# Altium PCB SLT.PcbDoc (part 7 of 8)
Units mm, origin at the board's own origin, x right, y up, seen from the top; angles counter-clockwise.
Board outline 150 x 66 mm, 6 copper layers (L1 TOP, L2 GND 1, L3 SIGNAL, L4 PWR, L5 GND 2, L6 BOT), stack 1.598 mm thick; 797 components, 541 nets, 2680 pads, 2120 vias.
Unrouted connection lines stored in the file: 31.
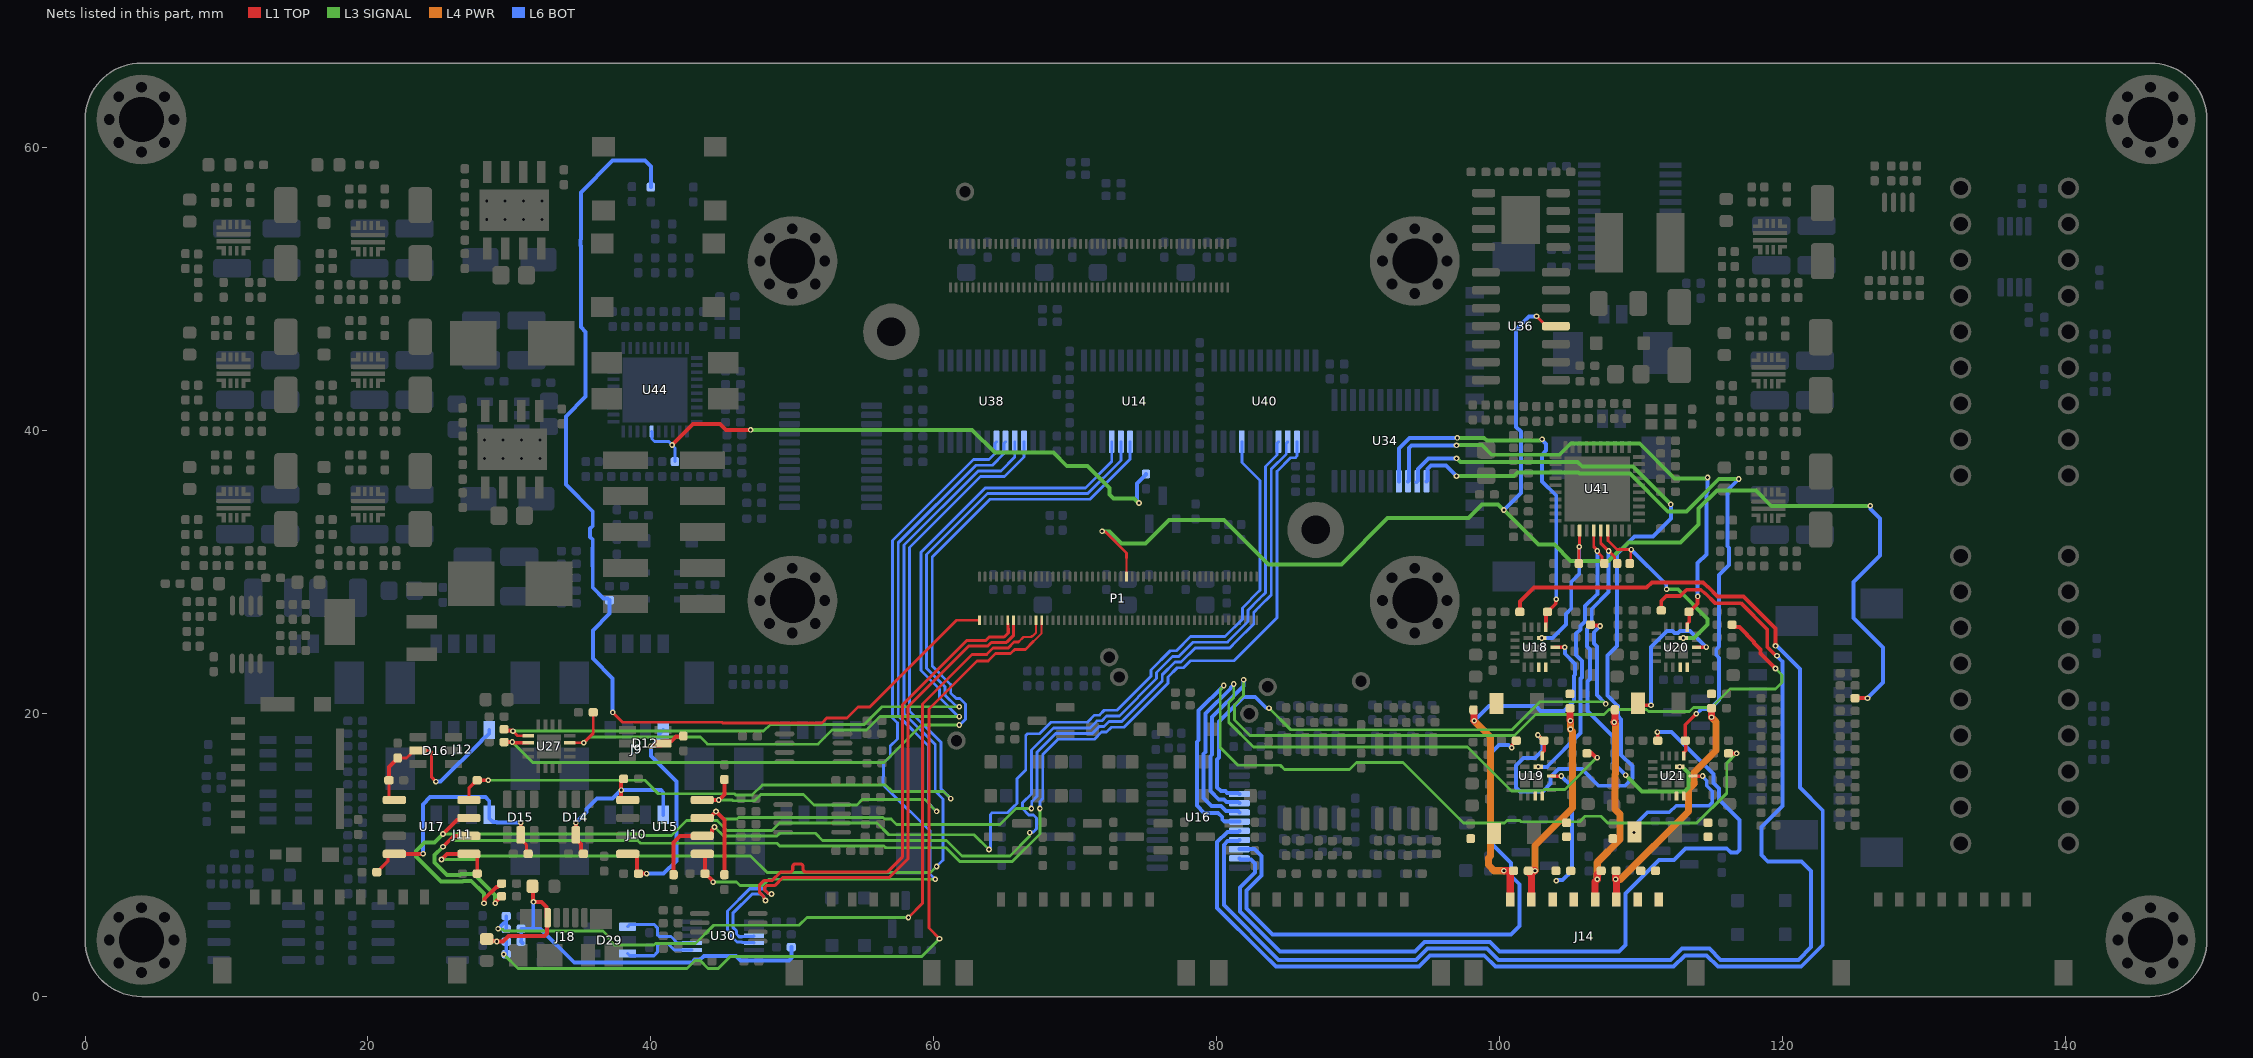
[diagram p11: the nets of this part, all layers, seen from the top]

## Via types
v1: diameter 0.4, hole 0.2, L1 TOP to L6 BOT, tented both sides, 2120 vias

## Nets (pads, with @x,y where several pads share a name; then routed paths per layer and width w, separated by ;. In a path a pad name is that pad's centre, name@x,y a point inside that pad or via, vN(x,y) a via of type N, cw(c..) or ccw(c..) an arc to the next point about the centre after c; other vN are vias at no path point) (continued)
SPI1_SCK: P1.53 R66.1 U36.4 | length 101
  L1 TOP w0.15: P1.53@73.625,29.69 73.625,31
  L1 TOP w0.2: v1(71.9,32.9) 71.938,32.862 72.134,32.862 73.625,31.371 73.625,31 ; v1(102.6,48.1) 102.6,48.095 103.295,47.4 U36.4@103.975,47.4
  L1 TOP w0.28: R66.1@125.125,21.1 v1(126,21.1)
  L3 SIGNAL w0.28: v1(71.9,32.9) 71.923,32.877 72.43,32.877 73.277,32.03 74.979,32.03 76.639,33.69 80.517,33.69 83.647,30.56 88.817,30.56 92.087,33.83 97.802,33.83 98.762,34.79 99.878,34.79 100.268,34.4 v1@100.276,34.4 ; v1(100.3,34.4) 102.75,31.95 103.882,31.95 105.022,30.81 107.703,30.81 108.514,31.621 108.628,31.621 109.1,32.093 112.786,32.093 114.071,33.378 114.071,34.505 115.356,35.79 116.477,35.79 118.11,35.79 119.2,34.7 121.476,34.7 v1@126.18,34.7
  L6 BOT w0.28: v1(100.3,34.4) 101.5,35.6 101.5,39.95 101.17,40.28 101.17,47.163 102.084,48.077 102.577,48.077 v1(102.6,48.1) ; v1(126,21.1) 127.1,22.2 127.1,24.669 125,26.769 125,29.3 126.9,31.2 126.9,33.8 126.223,34.477 126.223,34.677 v1(126.2,34.7)
SYS_nRST_PMIC: P1.2 R76.2 R251.2 | length 76.9
  L1 TOP w0.15: 62.5,26.61 P1.2@63.225,26.61
  L1 TOP w0.2: v1(37.3,20.1) 38.005,19.395 45.023,19.395 45.068,19.35 52.086,19.35 52.436,19.7 53.864,19.7 54.634,20.47 55.47,20.47 61.61,26.61 62.5,26.61
  L6 BOT w0.28: v1(37.3,20.1) 37.3,22.506 35.9,23.906 35.9,25.9 37.075,27.075 R251.2@37.075,28.025 36.939,28.161 36.639,28.161 35.89,28.91 35.89,30.44 35.88,30.45 35.88,31.707 35.89,31.717 35.89,32.32 35.71,32.5 35.71,33.103 35.89,33.283 35.89,34.31 33.99,36.21 33.99,41.011 35.39,42.411 35.39,46.993 35.05,47.333 35.05,53.057 35.01,53.097 35.01,53.503 35.05,53.543 35.05,56.85 37.3,59.1 39.6,59.1 40,58.7 R76.2@40,57.225
TEC_ADC_1: C73.2 U18.20 U41.33 | length 10.3
  L1 TOP w0.2: C73.2@105.6,30.625 105.613,30.637 105.613,31.788 105.638,31.812 105.638,32.942 U41.33@105.65,32.955
  L6 BOT w0.28: v1(102.975,25.35) 103.743,25.35 104.69,26.297 104.69,27.065 105.06,27.435 105.06,29.329 105.625,29.894 v1(105.625,31.8)
TEC_ADC_2: C230.2 U20.20 U41.37 | length 13.8
  L1 TOP w0.2: U41.37@107.65,32.955 107.65,32.235 108.285,31.6 v1(109.3,31.6) 109.262,31.562 109.262,30.687 C230.2@109.2,30.625
  L3 SIGNAL w0.28: v1(111.8,28.8) 112.593,28.8 114.69,26.703 114.69,26.297 113.753,25.36 v1(112.975,25.36)
  L6 BOT w0.28: v1(109.3,31.6) 111.777,29.123 111.777,28.823 v1(111.8,28.8)
TEC_ADC_3: C236.2 U19.20 U41.35 | length 20.3
  L1 TOP w0.2: U41.35@106.65,32.955 106.65,31.804 106.9,31.554 v1(106.9,31.5) 106.9,31.455 107.231,31.124 107.231,30.794 C236.2@107.4,30.625
  L6 BOT w0.28: v1(102.725,16.25) 102.727,16.252 103.345,16.252 105.73,18.637 105.73,22.484 105.82,22.574 105.82,23.737 105.41,24.147 105.41,25.659 105.7,25.949 105.7,26.2 106.03,26.53 106.03,27.602 106.9,28.472 v1(106.9,31.5)
TEC_ADC_4: C231.2 U21.20 U41.36 | length 27.4
  L1 TOP w0.2: U41.36@107.15,32.955 107.15,32.05 108.131,31.069 108.131,30.794 C231.2@108.3,30.625
  L3 SIGNAL w0.28: v1(108.903,15.66) 110.052,14.51 113.053,14.51 113.34,14.797 113.34,15.803 112.916,16.227 112.748,16.227 v1(112.725,16.25)
  L6 BOT w0.28: v1(107.7,31.5) 107.7,28.593 106.51,27.403 106.51,26.331 106.18,26.001 106.18,24.763 106.39,24.553 106.39,22.465 106.21,22.285 106.21,20.197 108.04,18.367 108.04,16.522 v1(108.903,15.66)
TEC_EN_1: R133.2 U16.8 | length 97.6
  L1 TOP w0.28: R133.2@101.425,27.2 101.425,27.92 102.415,28.91 110.388,28.91 110.768,29.29 114.365,29.29 114.678,28.978 114.722,28.978 115.41,28.29 117.249,28.29 119.5,26.039 v1(119.5,24.8)
  L6 BOT w0.28: U16.8@81.6,11.725 81.515,11.64 80.746,11.64 80.03,10.924 80.03,6.273 83.163,3.14 84.183,2.12 94.289,2.12 95.089,2.92 98.911,2.92 99.711,2.12 112.289,2.12 113.089,2.92 114.621,2.92 115.421,2.12 121.32,2.12 122.84,3.64 122.84,13.167 121.228,14.779 121.228,23.165 119.616,24.777 119.523,24.777 v1(119.5,24.8)
TEC_EN_2: R143.2 U16.9 | length 86.4
  L1 TOP w0.25: R143.2@111.425,27.3 111.425,27.975 111.775,28.325 112.761,28.325 113.211,28.775 114.223,28.775 114.485,28.513 114.53,28.513 115.217,27.825 117.057,27.825 118.9,25.982 118.9,24.728 119.5,24.129 119.571,24.129 v1(119.6,24.1)
  L6 BOT w0.28: U16.9@81.6,11.075 81.515,10.99 80.775,10.99 80.51,10.725 80.51,6.472 84.382,2.6 94.09,2.6 94.89,3.4 99.11,3.4 99.91,2.6 112.09,2.6 112.89,3.4 114.82,3.4 115.62,2.6 121.121,2.6 122.02,3.499 122.02,8.88 121.35,9.55 118.95,9.55 118.5,10 118.5,12 119.99,13.49 119.99,23.678 119.6,24.068 v1(119.6,24.1)
TEC_EN_3: R134.2 U16.10 | length 41.6
  L1 TOP w0.25: v1(100.85,17.6) 100.879,17.629 100.879,17.815 101.163,18.1 R134.2@101.175,18.1
  L6 BOT w0.28: U16.10@81.6,10.425 82.675,10.425 83.17,9.93 83.17,8.571 82.11,7.511 82.11,6.229 83.939,4.4 100.8,4.4 101.39,4.99 101.39,7.946 100.79,8.546 100.79,9.451 99.46,10.781 99.46,17.303 99.947,17.79 100.627,17.79 100.817,17.6 v1(100.85,17.6)
TEC_EN_4: R144.2 U16.11 | length 59.4
  L1 TOP w0.25: v1(111.15,18.7) 111.175,18.675 R144.2@111.175,18.1
  L6 BOT w0.28: U16.11@81.6,9.775 81.685,9.69 82.425,9.69 82.69,9.425 82.69,8.77 81.63,7.71 81.63,6.03 84.46,3.2 94.012,3.2 94.692,3.88 99.308,3.88 99.988,3.2 108.434,3.2 108.89,3.656 108.89,7.291 111.259,9.66 112.313,9.66 113.143,10.49 116.053,10.49 116.343,10.2 116.776,10.2 116.94,10.364 116.94,12.503 115.49,13.953 115.49,14.717 115.11,15.097 115.11,15.733 112.143,18.7 v1(111.15,18.7)
TEC_nCS_1: R129.2 U18.15 U34.17 | length 27.1
  L1 TOP w0.25: U18.15@103.25,26.11 103.25,26.478 103.275,26.503 103.275,27.1 R129.2@103.375,27.2 ; R129.2@103.386,27.2 103.4,27.2 103.971,27.771 103.971,28.071 v1(104,28.1)
  L3 SIGNAL w0.28: v1(97,39.5) 98.907,39.5 99.097,39.31 102.878,39.31 102.968,39.4 v1(103,39.4)
  L6 BOT w0.28: U34.17@92.875,36.43 92.875,38.754 93.621,39.5 v1(97,39.5) ; v1(103,39.4) 103,39.368 103.29,39.078 103.29,38.597 103,38.307 103,36.424 104,35.424 v1(104,28.1)
TEC_nCS_2: R139.2 U20.15 U34.16 | length 36.4
  L1 TOP w0.25: U20.15@113.25,26.12 113.25,26.353 113.4,26.503 R139.2@113.4,27.185
  L1 TOP w0.28: R139.2@113.4,27.2 113.977,27.777 113.977,28.277 v1(114,28.3)
  L3 SIGNAL w0.28: v1(96.95,38.972) 96.968,38.99 98.738,38.99 99.418,38.31 104.243,38.31 105.053,39.12 109.878,39.12 112.368,36.63 114.598,36.63 114.645,36.677 114.677,36.677 v1(114.7,36.7)
  L6 BOT w0.28: U34.16@93.525,36.43 93.59,36.495 93.59,38.79 93.772,38.972 v1(96.95,38.972) ; v1(114,28.3) 114,30.644 114.623,31.267 114.623,35.595 114.7,35.672 v1(114.7,36.7)
TEC_nCS_3: R130.2 U19.15 U34.15 | length 60.1
  L1 TOP w0.25: v1(102.7,18.5) 103.1,18.1 R130.2@103.125,18.1 103.15,18.075 103.15,17.393 103,17.243 U19.15@103,17.01
  L3 SIGNAL w0.28: v1(96.95,38.05) 96.982,38.05 97.242,37.79 105.517,37.79 105.837,37.47 109.43,37.47 v1(112.1,34.8)
  L6 BOT w0.28: U34.15@94.11,36.365 94.24,36.495 94.24,37.315 94.96,38.035 94.989,38.035 95.004,38.05 v1(96.95,38.05) ; v1(102.7,18.5) 102.7,18.468 103.04,18.128 103.04,17.397 102.505,16.863 101.694,16.863 101.16,16.328 101.16,14.797 101.447,14.51 103.053,14.51 103.6,15.057 103.6,15.543 104.147,16.09 105.817,16.09 106.997,14.91 108.846,14.91 109.393,15.457 109.393,16.291 108.59,17.094 108.59,19.603 108.361,19.832 108.361,20.532 107.61,21.283 107.61,24.117 108.29,24.797 108.29,31.283 109.541,32.534 110.826,32.534 112.1,33.807 v1(112.1,34.8)
TEC_nCS_4: R140.2 U21.15 U34.14 | length 47.4
  L1 TOP w0.25: U21.15@113,17.01 113,17.243 113.15,17.393 113.15,18.075 R140.2@113.125,18.1 113.125,19.225 v1(113.9,20)
  L3 SIGNAL w0.28: v1(96.95,36.8) 101.014,36.8 101.265,37.051 105.577,37.051 105.638,36.99 109.203,36.99 111.883,34.31 113.197,34.31 115.487,36.6 116.477,36.6 v1(116.9,36.6)
  L6 BOT w0.28: U34.14@94.825,36.43 94.89,36.495 94.89,37.286 95.159,37.555 96.195,37.555 v1(96.95,36.8) ; v1(113.9,20) 113.932,20 114.259,20.327 114.873,20.327 115.51,20.963 115.51,23.947 115.31,24.147 115.31,24.553 115.51,24.753 115.51,29.81 116.21,30.51 116.21,31.732 116.1,31.842 116.1,35.8 v1(116.9,36.6)
TEC_OUT_A_1: C94.2 C95.2 C106.2 J14.2 U18.8 U18.9 | length 15.3
  L1 TOP w0.5: J14.2@102.25,6.87 102.25,8.557 102.1,8.707 102.1,8.85 C106.2@102.05,8.9 ; v1(102.5,8.9) C106.2@102.05,8.9 ; C95.2@104.975,20.4 104.975,19.525 v1(105,19.5) ; C106.2@102.05,8.9 C106.2@102.025,8.9 C106.2@102.05,8.9
  L4 PWR w0.5: v1(102.5,8.9) 102.5,10.699 105.15,13.349 105.15,18.75 v1(105,18.9) v1(105,19.5)
TEC_OUT_A_2: C116.2 C117.2 C128.2 J14.6 U20.8 U20.9 | length 17.4
  L1 TOP w0.5: C128.2@108.225,8.9 108.2,8.875 v1(108.2,8.3) 108.25,8.25 J14.6@108.25,6.87 ; C117.2@114.975,20.4 114.978,20.397 v1(114.978,19.753)
  L4 PWR w0.5: v1(108.2,8.3) 108.549,8.3 113.35,13.101 113.35,14.651 113.75,15.051 113.75,15.849 115.3,17.399 115.3,19.432 v1(114.978,19.753)
TEC_OUT_A_3: C96.2 C97.2 C107.2 J14.4 U19.8 U19.9
TEC_OUT_A_4: C118.2 C119.2 C129.2 J14.8 U21.8 U21.9
TEC_OUT_B_1: C106.1 C112.2 J14.1 L3.2 U18.12 | length 28.3
  L1 TOP w0.25: U18.12@103.925,24.7 103.936,24.689 104.589,24.689 v1(104.6,24.7)
  L1 TOP w0.5: C112.2@98.15,20.275 98.2,20.225 v1(98.2,19.5) ; v1(100.3,8.9) C106.1@100.95,8.9 ; J14.1@100.75,6.87 100.75,8.7 C106.1@100.95,8.9 ; C106.1@100.975,8.9 C106.1@100.95,8.9
  L4 PWR w0.5: v1(98.2,19.5) 99.35,18.35 99.35,9.948 99.2,9.799 99.2,9.301 99.601,8.9 v1(100.3,8.9)
  L6 BOT w0.28: v1(98.2,19.5) 99.24,20.54 102.557,20.54 102.887,20.21 104.557,20.21 105.25,20.903 105.25,22.683 105.34,22.773 105.34,23.524 104.623,24.241 104.623,24.677 v1(104.6,24.7)
TEC_OUT_B_2: C128.1 C134.2 J14.5 L5.2 U20.12 | length 25.8
  L1 TOP w0.25: U20.12@113.925,24.71 113.936,24.699 114.589,24.699 v1(114.6,24.71)
  L1 TOP w0.28: L5.2@109.789,20.742 109.93,20.6 v1(110.7,20.6)
  L1 TOP w0.5: J14.5@106.75,6.87 106.75,8.15 v1(106.9,8.3) 106.9,8.625 107.1,8.825 107.1,8.85 107.15,8.9 C128.1@107.175,8.9 ; v1(108.1,19.4) 108.15,19.45 C134.2@108.15,20.285
  L4 PWR w0.5: v1(106.9,8.3) 106.9,9.5 108.5,11.1 108.5,12.898 108.15,13.249 108.15,15.701 108.2,15.751 108.2,19.3 v1(108.1,19.4)
  L6 BOT w0.28: v1(110.7,20.6) 110.7,24.728 111.822,25.85 112.228,25.85 112.373,25.705 112.605,25.705 112.75,25.85 113.46,25.85 v1(114.6,24.71)
TEC_OUT_B_3: C107.1 C113.2 J14.3 L4.2 U19.12 | length 9.1
  L1 TOP w0.25: U19.12@103.675,15.6 103.686,15.589 104.339,15.589 v1(104.35,15.6)
  L6 BOT w0.28: v1(104,8.2) 104.023,8.223 104.108,8.223 104.117,8.232 104.432,8.232 105.1,8.9 105.1,14.85 v1(104.35,15.6)
TEC_OUT_B_4: C129.1 C135.2 J14.7 L6.2 U21.12 | length 9.5
  L1 TOP w0.25: U21.12@113.675,15.6 113.686,15.589 114.339,15.589 v1(114.35,15.6)
  L6 BOT w0.25: v1(109.5,11.6) 109.529,11.629 109.529,12.107 110.447,13.025 111.372,13.025 111.997,13.025 112.472,13.5 114.8,13.5 115.025,13.725 115.025,14.525 114.645,14.904 114.645,15.264 114.35,15.559 v1(114.35,15.6)
TEC_SWEN_1: R131.1 U16.4 | length 43.1
  L1 TOP w0.28: R131.1@106.435,26.3 106.512,26.223 107.077,26.223 v1(107.1,26.2)
  L3 SIGNAL w0.2: v1(83.7,20.4) 85.23,18.87 100.879,18.87 102.859,20.85 107.296,20.85 107.446,20.7 v1(107.5,20.7)
  L6 BOT w0.28: U16.4@81.6,14.325 81.515,14.41 80.719,14.41 80.605,14.524 80.29,14.524 80.03,14.784 80.03,16.774 80.16,16.904 80.16,19.46 81.877,21.177 82.723,21.177 83.477,20.423 83.677,20.423 v1(83.7,20.4) ; v1(107.1,26.2) 106.66,25.76 106.66,24.962 106.87,24.752 106.87,21.33 v1(107.5,20.7)
TEC_SWEN_2: R141.1 U16.5 | length 60.9
  L1 TOP w0.28: R141.1@116.425,26.31 116.589,26.146 116.957,26.146 117.49,25.613 117.49,25.552 117.97,25.072 117.97,25.015 118.435,24.55 118.435,24.265 v1(119.5,23.2)
  L3 SIGNAL w0.2: v1(81.9,22.4) 81.9,21.28 81.25,20.63 81.25,19.565 82.345,18.47 101.045,18.47 102.525,19.95 107.377,19.95 107.727,20.3 110.364,20.3 110.514,20.15 113.414,20.15 113.714,20.45 114.986,20.45 116.286,21.75 119.486,21.75 119.95,22.214 119.95,22.75 v1(119.5,23.2)
  L6 BOT w0.28: U16.5@81.6,13.675 81.515,13.76 80.691,13.76 80.501,13.95 80.143,13.95 79.55,14.543 79.55,16.973 79.68,17.103 79.68,19.78 81.877,21.977 81.877,22.377 v1(81.9,22.4)
TEC_SWEN_3: R132.1 U16.6 | length 44.7
  L1 TOP w0.28: R132.1@106.175,17.21 106.5,17.21 106.839,16.871 106.868,16.9 v1(106.9,16.9)
  L3 SIGNAL w0.2: v1(81.2,22.1) 81.2,21.146 80.85,20.796 80.85,19.399 82.599,17.65 97.736,17.65 100.836,14.55 103.036,14.55 103.136,14.65 104.614,14.65 106.864,16.9 v1(106.9,16.9)
  L6 BOT w0.28: v1(81.2,22.1) 81.2,22.068 80.99,21.858 80.99,21.797 79.2,20.007 79.2,17.301 79.07,17.171 79.07,14.03 79.63,13.47 80.302,13.47 80.662,13.11 81.515,13.11 U16.6@81.6,13.025
TEC_SWEN_4: R142.1 U16.7 | length 60.8
  L1 TOP w0.28: R142.1@116.185,17.2 v1(116.75,17.2)
  L3 SIGNAL w0.2: v1(80.5,22) 80.5,21.946 80.25,21.696 80.25,17.614 81.509,16.355 84.486,16.355 84.791,16.05 89.386,16.05 89.886,16.55 93.162,16.55 97.442,12.27 100.335,12.27 100.515,12.45 101.416,12.45 101.496,12.37 105.656,12.37 106.036,12.75 107.164,12.75 107.644,12.27 113.935,12.27 116.05,14.385 116.05,16.5 v1(116.75,17.2)
  L6 BOT w0.28: v1(80.5,22) 78.72,20.22 78.72,18.141 78.59,18.011 78.59,13.51 79.11,12.99 80.103,12.99 80.39,12.703 80.39,12.539 80.554,12.375 U16.7@81.6,12.375
"TEMP _SENSOR": C255.2 R296.2 U44.26 | length 42
  L1 TOP w0.28: v1(41.5,39) 42.99,40.49 44.896,40.49 45.318,40.068 v1(47.05,40.068)
  L3 SIGNAL w0.28: v1(47.05,40.068) 62.71,40.068 64.318,38.46 68.447,38.46 69.397,37.51 70.869,37.51 72.41,35.969 72.41,35.497 72.697,35.21 74.162,35.21 74.472,34.9 v1(74.504,34.9)
  L6 BOT w0.2: U44.26@40.05,39.955 40.075,39.93 40.075,39.425 40.265,39.235 41.265,39.235 v1(41.5,39) 41.5,38.983 41.7,38.783 C255.2@41.7,37.825
  L6 BOT w0.28: v1(74.504,34.9) 74.504,34.932 74.36,35.077 74.36,36.285 75,36.925 R296.2@75,36.95
USB1_DETECT: P1.24 R226.1 R228.2 | length 61.3
  L1 TOP w0.15: 67.025,25.1 67.625,25.7 P1.24@67.625,26.61
  L1 TOP w0.2: v1(60.4,4.1) 59.65,4.85 59.65,20.344 63.046,23.74 63.843,23.74 64.353,24.25 65.427,24.25 65.727,24.55 66.475,24.55 67.025,25.1
  L3 SIGNAL w0.2: v1(29.6,3) 30.6,2 38.455,2 42.564,2 43.114,2.55 43.486,2.55 44.036,2 44.764,2 45.614,2.85 59.15,2.85 v1(60.4,4.1)
  L6 BOT w0.25: v1(29.6,3) R228.2@29.775,3 R226.1@29.775,3.9
USB1_ID: P1.22 R227.1 R229.2 | length 58.6
  L1 TOP w0.15: 66.011,25.1 66.336,25.425 66.869,25.425 66.919,25.475 66.976,25.475 67.225,25.724 P1.22@67.225,26.61
  L1 TOP w0.2: v1(58.2,5.6) 59.2,6.6 59.2,20.7 62.7,24.2 63.737,24.2 64.187,24.65 65.261,24.65 65.681,25.07 65.981,25.07 66.011,25.1
  L3 SIGNAL w0.2: v1(29.2,4.8) 29.238,4.762 29.505,4.762 29.546,4.721 29.617,4.65 36.608,4.65 37.032,4.226 37.032,4.031 37.414,3.65 38.455,3.65 40.231,3.65 40.331,3.75 43.148,3.75 44.448,5.05 50.481,5.05 51.031,5.6 v1(58.2,5.6)
  L6 BOT w0.25: v1(29.2,4.8) 29.546,5.146 29.775,5.375 ; R227.1@29.775,4.8 29.775,5.375 ; R229.2@29.775,5.7 29.775,5.375
USB1_N: P1.14 U30.4 | length 40.5
  L1 TOP w0.22: v1(48.524,7.26) 48.49,7.294 48.29,7.294 48.05,7.535 48.05,7.717 48.178,7.846 48.746,7.846 49.32,8.42 56.857,8.42 58.18,9.743 58.18,20.492 62.488,24.8 63.828,24.8 64.07,25.042 65.13,25.042 65.188,25.1 65.64,25.552 65.64,26.188 65.625,26.203 P1.14@65.625,26.37
  L6 BOT w0.22: U30.4@47.3,3.8 47.26,3.84 46.443,3.84 46.423,3.86 46.084,3.86 45.67,4.274 45.67,4.493 45.42,4.743 45.42,6.057 46.991,7.628 47.956,7.628 48.29,7.294 48.49,7.294 v1(48.524,7.26)
USB1_P: P1.12 U30.3 | length 40.1
  L1 TOP w0.22: v1(48.1,6.8) 48.1,6.849 47.994,6.954 47.994,7.053 47.67,7.377 47.67,7.874 48.021,8.226 48.589,8.226 49.163,8.8 49.7,8.8 49.81,8.8 ccw(c49.81,9.02) 50.03,9.02 50.03,9.2 cw(c50.212,9.2) 50.212,9.382 50.576,9.382 cw(c50.576,9.2) 50.758,9.2 50.758,9.02 ccw(c50.978,9.02) 50.978,8.8 51.8,8.8 56.7,8.8 57.8,9.9 57.8,20.649 62.331,25.18 63.671,25.18 63.912,25.422 64.972,25.422 65.26,25.709 65.26,26.031 65.235,26.056 P1.12@65.235,26.37
  L6 BOT w0.22: U30.3@47.3,4.3 47.26,4.26 46.443,4.26 46.423,4.24 46.241,4.24 46.05,4.431 46.05,4.65 45.8,4.9 45.8,5.9 47.148,7.248 47.799,7.248 47.994,7.053 47.994,6.954 48.1,6.849 v1(48.1,6.8)
USB_D_N: D29.6 U30.6 | length 5.4
  L6 BOT w0.22: D29.6@38.355,3.05 38.455,2.951 38.515,2.89 40.22,2.89 40.46,3.13 40.46,3.621 40.589,3.75 41.213,3.75 41.663,3.3 U30.6@42.9,3.3
USB_D_P: D29.4 U30.7 | length 5.4
  L6 BOT w0.22: D29.4@38.355,4.95 38.455,5.049 38.515,5.11 40.22,5.11 40.46,4.87 40.46,4.379 40.589,4.25 41.42,4.25 41.87,3.8 U30.7@42.9,3.8
USB_PWR1: C71.2 D12.5 J9.1 R110.2 U15.8 | length 18
  L1 TOP w0.28: U15.8@38.365,10.095 38.857,10.095 39.011,9.941 39.011,8.814 R110.2@39.125,8.7 v1(39.7,8.7) ; v1(40,17.7) 40.032,17.7 40.077,17.745 40.7,17.745 D12.5@40.855,17.9 41.01,18.055 41.455,18.055 41.777,18.377 42.252,18.377 C71.2@42.3,18.425
  L6 BOT w0.28: v1(39.7,8.7) 40.9,8.7 41.8,9.6 41.8,15.2 40,17 v1(40,17.7) 40.615,18.315 40.615,18.59 J9.1@40.875,18.85
USB_PWR2: C74.2 D14.5 J10.1 R119.2 U15.5 | length 13.3
  L1 TOP w0.28: v1(34.7,12.3) 34.7,11.135 35.055,10.78 35.055,10.259 35.214,10.1 C74.2@35.225,10.1 ; R119.2@38.075,15.4 38.059,15.4 37.9,15.241 v1(37.9,14.6) 37.9,14.059 38.054,13.905 U15.5@38.365,13.905
  L6 BOT w0.28: v1(34.7,12.3) 35.458,13.058 35.458,13.265 36.193,14 37.3,14 v1(37.9,14.6) 40.711,14.6 40.875,14.436 J10.1@40.875,12.85
USB_PWR3: C80.2 D15.5 J11.1 R124.2 U17.8 | length 18.5
  L1 TOP w0.22: R124.2@20.625,8.8 20.628,8.8 20.84,9.012 20.84,9.015 21.424,9.599 21.424,9.913 21.606,10.095 U17.8@21.865,10.095 ; v1(30.8,12.3) D15.5@30.8,11.445 30.8,11.135 31.205,10.73 31.205,10.22 C80.2@31.325,10.1
  L1 TOP w0.28: U17.8@21.865,10.095 23.895,10.095 v1(23.9,10.1)
  L6 BOT w0.28: v1(23.9,10.1) 23.9,13.6 24.4,14.1 28.3,14.1 28.575,13.825 J11.1@28.575,12.85 28.575,12.6 28.835,12.34 29.085,12.34 29.125,12.3 v1(30.8,12.3)
USB_PWR4: C90.2 D16.5 J12.1 R126.2 U17.5 | length 13.8
  L1 TOP w0.22: R126.2@21.475,15.3 21.475,14.087 21.657,13.905 U17.5@21.865,13.905 ; C90.2@22.1,16.875 22.73,16.875 23.05,17.195 23.05,17.215 23.235,17.4 D16.5@23.545,17.4 24.371,17.4 24.5,17.271 24.5,15.5 v1(24.8,15.2)
  L1 TOP w0.28: R126.2@21.475,15.3 21.475,16.225 22.1,16.85 C90.2@22.1,16.875
  L6 BOT w0.28: v1(24.8,15.2) 24.808,15.208 25.144,15.208 28.015,18.08 28.015,18.115 28.24,18.34 28.315,18.34 28.575,18.6 J12.1@28.575,18.85
USB_PWR_EN1: R118.1 U15.1 U38.18 | length 55.1
  L1 TOP w0.28: U15.1@43.635,10.095 43.671,10.095 43.825,9.941 R118.1@43.825,8.7 43.845,8.7 44.377,8.168 44.377,8.123 v1(44.4,8.1)
  L3 SIGNAL w0.2: v1(44.4,8.1) 46.058,8.1 46.308,7.85 47.912,7.85 48.362,8.3 v1(60.1,8.3)
  L6 BOT w0.2: v1(60.1,8.3) 59.725,8.675 59.725,11.724 58.349,13.1 58.301,13.1 56.45,14.951 56.45,15.043 56.4,15.093 56.4,15.507 56.45,15.557 56.45,16.514 56.925,16.989 56.925,17.724 57.425,18.224 57.425,19.359 57.09,19.694 57.09,32.249 62.808,37.967 63.896,37.967 64.32,38.391 64.32,39.125 U38.18@64.425,39.23
USB_PWR_EN2: R117.1 U15.4 U38.17 | length 50.3
  L1 TOP w0.28: U15.4@43.635,13.905 44.795,13.905 v1(44.8,13.9) 45.2,14.3 R117.1@45.2,15.35
  L3 SIGNAL w0.2: v1(44.8,13.9) 45.778,13.9 45.828,13.85 47.326,13.85 47.772,14.296 50.793,14.296 51.539,13.55 54.559,13.55 54.939,13.93 59.37,13.93 v1(60.2,13.1)
  L6 BOT w0.2: v1(60.2,13.1) 59.625,13.675 59.625,17.724 57.49,19.859 57.49,32.083 62.974,37.567 64.146,37.567 64.97,38.391 64.97,39.125 U38.17@65.075,39.23
USB_PWR_EN3: R121.1 U17.1 U38.16 | length 75.3
  L1 TOP w0.22: U17.1@27.135,10.095 27.543,10.095 27.725,9.913 R121.1@27.725,8.7
  L1 TOP w0.28: v1(25.2,9.7) 25.595,10.095 U17.1@27.135,10.095
  L3 SIGNAL w0.2: v1(25.2,9.7) 27.655,9.7 27.905,9.95 30.307,9.95 30.316,9.94 35.538,9.94 35.548,9.95 47.042,9.95 48.222,8.77 59.77,8.77 v1(60.2,9.2)
  L6 BOT w0.2: v1(60.2,9.2) 60.65,9.65 60.65,13.984 60.1,14.534 60.1,17.815 57.89,20.025 57.89,31.918 63.14,37.167 64.747,37.167 65.725,38.145 U38.16@65.725,39.23
USB_PWR_EN4: R120.1 U17.4 U38.15 | length 67
  L1 TOP w0.22: U17.4@27.135,13.905 27.135,14.735 27.7,15.3 R120.1@27.725,15.3
  L1 TOP w0.28: R120.1@27.725,15.3 v1(28.5,15.3)
  L3 SIGNAL w0.2: v1(28.5,15.3) 39.574,15.3 40.524,14.35 45.894,14.35 45.994,14.25 47.161,14.25 47.879,14.968 56.596,14.968 57.06,14.503 60.697,14.503 v1(61.2,14)
  L6 BOT w0.2: v1(61.2,14) 60.5,14.7 60.5,17.981 58.29,20.191 58.29,31.752 63.305,36.767 64.997,36.767 66.375,38.145 U38.15@66.375,39.23
USB_PWR_nOC1: R348.2 U15.2 U40.17 | length 69.6
  L1 TOP w0.28: R348.2@41.6,8.625 41.6,10.9 42.065,11.365 U15.2@43.635,11.365 44.156,11.365 44.31,11.519 44.31,11.778 44.5,11.968 v1(44.5,12)
  L3 SIGNAL w0.2: v1(44.5,12) 45.15,11.35 48.914,11.35 49.114,11.55 51.634,11.55 52.134,11.05 60.904,11.05 62.004,9.95 65.376,9.95 66.764,11.337
  L6 BOT w0.2: v1(66.786,11.6) 66.825,11.638 66.966,11.638 66.978,11.65 67.04,11.65 67.26,11.87 67.26,12.63 67.04,12.85 66.714,12.85 66.27,13.294 66.27,13.706 66.9,14.336 66.9,17.444 68.456,19 71.031,19 71.531,19.5 71.868,19.5 72.218,19.85 73.116,19.85 75.75,22.484 75.75,22.918 76.882,24.05 77.316,24.05 78.316,25.05 80.752,25.05 80.802,25.1 82.218,26.516 82.218,27.32 83,28.102 83.45,28.552 83.45,37.468 84.27,38.288 84.27,39.125 U40.17@84.375,39.23
USB_PWR_nOC2: R349.2 U15.3 U40.16 | length 66.5
  L1 TOP w0.28: U15.3@43.635,12.635 44.156,12.635 44.6,13.079 v1(44.6,13.1) 45.2,12.5 R349.2@45.2,8.625
  L3 SIGNAL w0.2: v1(44.6,13.1) 44.602,13.1 45.152,12.55 46.089,12.55 46.209,12.67 56.394,12.67 56.514,12.55 56.986,12.55 57.366,12.17 64.67,12.17 65.8,13.3 v1(66.9,13.3)
  L6 BOT w0.2: v1(66.9,13.3) 66.929,13.329 66.929,13.8 67.3,14.171 67.3,17.278 68.622,18.6 71.197,18.6 71.697,19.1 72.033,19.1 72.383,19.45 73.281,19.45 76.15,22.319 76.15,22.752 77.048,23.65 77.481,23.65 78.481,24.65 80.918,24.65 81.368,25.1 82.618,26.35 82.618,27.155 83,27.536 83.85,28.386 83.85,37.302 84.92,38.372 84.92,39.125 U40.16@85.025,39.23
USB_PWR_nOC3: R350.2 U17.2 U40.15 | length 93.6
  L1 TOP w0.28: v1(25.3,10.6) 26.065,11.365 U17.2@27.135,11.365 ; v1(29,6.6) 29.023,6.623 29.023,6.693 29.43,7.1 R350.2@29.45,7.1
  L3 SIGNAL w0.2: v1(25.3,10.6) 25.75,11.05 39.067,11.05 39.267,10.85 48.914,10.85 49.114,10.65 56.482,10.65 56.602,10.53 60.858,10.53 61.838,9.55 65.542,9.55 67.5,11.508 v1(67.5,13.3)
  L3 SIGNAL w0.28: v1(25.3,10.6) 24.71,10.01 24.71,9.497 25.597,8.61 26.503,8.61 26.563,8.67 27.502,8.67 28.977,7.195 28.977,6.623 v1(29,6.6)
  L6 BOT w0.2: v1(67.5,13.3) 67.5,13.805 67.7,14.005 67.7,17.113 68.787,18.2 71.363,18.2 71.863,18.7 72.199,18.7 72.549,19.05 73.447,19.05 76.55,22.153 76.55,22.586 77.214,23.25 77.647,23.25 78.147,23.75 81.219,23.75 84.25,26.781 84.25,37.136 85.214,38.1 85.558,38.1 85.675,38.217 U40.15@85.675,39.23
USB_PWR_nOC4: R351.2 U17.3 U40.21 | length 96.4
  L1 TOP w0.28: v1(25.3,11.5) 26.285,12.485 26.985,12.485 U17.3@27.135,12.635 ; v1(28.2,6.6) 28.223,6.623 28.223,6.891 29.072,7.74 29.16,7.74 29.42,8 R351.2@29.45,8
  L3 SIGNAL w0.2: v1(25.3,11.5) 39.182,11.5 39.282,11.4 41.459,11.4 42.509,12.45 44.686,12.45 45.386,11.75 48.566,11.75 49.086,12.27 55.994,12.27 56.814,11.45 62.85,11.45 v1(63.9,10.4)
  L3 SIGNAL w0.28: v1(25.3,11.5) 24.69,10.89 23.997,10.89 23.41,10.303 23.41,9.897 25.177,8.13 26.702,8.13 26.762,8.19 27.303,8.19 28.2,7.293 v1(28.2,6.6)
  L6 BOT w0.2: v1(63.9,10.4) 63.9,10.454 64,10.554 64,12.883 64.117,13 65.2,13 65.622,13.422 65.635,13.422 65.869,13.656 65.869,13.669 65.87,13.67 65.87,15.404 66.5,16.034 66.5,18.473 66.617,18.59 67.48,18.59 68.29,19.4 70.866,19.4 71.366,19.9 71.702,19.9 72.052,20.25 72.95,20.25 75.35,22.65 75.35,23.083 76.717,24.45 77.15,24.45 78.15,25.45 80.586,25.45 81.818,26.682 81.818,27.486 83,28.668 83.05,28.718 83.05,36.486 81.775,37.761 U40.21@81.775,39.23
USB_SW_nOE: R114.2 U14.21 U27.15 | length 61.5
  L1 TOP w0.2: U27.15@34.27,17.95 v1(35.25,17.95) 35.925,18.625 R114.2@35.925,20.1
  L3 SIGNAL w0.2: v1(35.25,17.95) 35.65,18.35 43.509,18.35 44.009,17.85 51.814,17.85 52.814,18.85 55.252,18.85 56.202,19.8 v1(61.8,19.8)
  L6 BOT w0.2: v1(61.8,19.8) 61.762,19.838 61.694,19.838 60.392,21.14 60.392,21.744 59.09,23.046 59.09,31.421 63.637,35.967 70.716,35.967 72.575,37.826 U14.21@72.575,39.23
USB_SW_SEL0: R116.1 U14.19 U27.6 | length 66.3
  L1 TOP w0.28: R116.1@29.625,18 v1(30.2,18) 30.232,18 30.282,17.95 U27.6@31.33,17.95
  L3 SIGNAL w0.2: v1(30.2,18) 31.65,16.55 56.486,16.55 59.136,19.2 v1(61.8,19.2)
  L6 BOT w0.2: v1(61.8,19.2) 61.836,19.2 62.25,19.614 62.25,20.686 61.857,21.079 61.585,21.079 61.192,21.472 61.192,22.076 59.89,23.378 59.89,31.089 63.968,35.167 71.047,35.167 73.875,37.995 U14.19@73.875,39.23
USB_SW_SEL1: R115.1 U14.20 U27.5 | length 63.8
  L1 TOP w0.2: v1(30.25,18.771) 30.571,18.45 U27.5@31.33,18.45
  L1 TOP w0.28: R115.1@29.625,18.9 29.705,18.82 30.169,18.82 30.218,18.771 v1(30.25,18.771)
  L3 SIGNAL w0.2: v1(30.25,18.771) 47.971,18.771 48.45,19.25 55.086,19.25 56.336,20.5 v1(61.8,20.5)
  L6 BOT w0.2: v1(61.8,20.5) 61.762,20.538 61.56,20.538 60.792,21.306 60.792,21.91 59.49,23.212 59.49,31.255 63.802,35.567 70.881,35.567 73.225,37.911 U14.20@73.225,39.23
VUSB: D25.2 J18.1 JP10.2 R226.2 R227.2 R230.1 | length 33
  L1 TOP w0.28: D25.2@28.4,4.075 28.527,3.948 29.052,3.948 v1(29.1,3.9) 29.546,3.9 29.946,4.3 32.489,4.3 32.653,4.464 32.653,5.534 J18.1@32.7,5.58 32.627,5.653 32.627,6.347 32.451,6.524 32.274,6.7 v1(31.7,6.7) 31.677,6.723 31.677,7.748 JP10.2@31.625,7.8
  L6 BOT w0.25: R226.2@30.825,3.9 R227.2@30.825,4.8 31.554,4.8 31.7,4.946 v1(31.7,6.7)
  L6 BOT w0.28: R226.2@30.825,3.9 R226.2@30.925,3.8 ; 31.554,4.8 32.2,4.8 34.6,2.4 38.455,2.4 42.907,2.4 43.097,2.59 43.45,2.59 43.75,2.89 46.017,2.89 46.346,2.561 49.761,2.561 49.925,2.725 R230.1@49.925,3.5
pads on no net: H9.1 H10.1 J15.8 J15.9 J16.6 J18.4 J20.6 J21.14 J21.15 J27.6 P1.6 P1.8 P1.9 P1.13 P1.15 P1.16 P1.18 P1.25 P1.29 P1.31 P1.34 P1.36 P1.38 P1.42 P1.44 P1.46 P1.47 P1.48 P1.50 P1.52 P1.55 P1.56 P1.62 P1.70 P1.77 P1.84 P1.85 P1.86 P1.87 P1.92 P1.97 P1.99 P2.1 P2.2 P2.3 P2.4 P2.5 P2.6 P2.7 P2.8 P2.11 P2.12 P2.13 P2.14 P2.15 P2.17 P2.18 P2.20 P2.21 P2.23 P2.24 P2.25 P2.26 P2.27 P2.49 P2.90 P2.93 P2.95 U1.2 U1.3 U8.2 U8.3 U9.4 U10.5 U10.19 U11.13 U11.14 U11.15 U11.16 U11.17 U11.18 U11.19 U11.20 U14.6 U14.9 U14.10 U14.14 U14.15 U14.18 U26.1 U26.2 U26.4 U26.5 U26.6 U26.17 U26.18 U27.16 U31.1 U32.4 U33.1 U36.2 U36.6 U36.7 U36.14 U37.4 U38.5 U38.19 U39.1 U39.2 U39.4 U39.5 U39.6 U39.17 U39.18 U40.10 U40.14 U41.2 U41.3 U41.4 U41.5 U41.10 U41.23 U41.24 U41.25 U41.38 U44.2 U44.3 U44.10 U44.23 U44.24 U44.25 U44.34 U44.35 U44.36 U44.37 U44.38

## Polygon pours and split planes (outlines as drawn)
NTC1+ on L4 PWR "L4 PWR-NTC1+" (solid, pour order 2): 15.8,20.75 16.6,19.95 19.4,19.95 20.6,18.75 20.6,8.25 82.3,8.25 82.3,7.4 94.5,7.4 94.5,18.85 82.3,18.85 82.3,10.2 24,10.2 22.2,12 22.2,21.55 19.1,24.65 19.1,28.05 20.5,29.45 24.6,29.45 25.1,29.95 25.1,31.15 24.5,31.75 16.3,31.75 15.8,31.25
+5V_SOM on L4 PWR "+5V_SOM_L04_P008" (solid, pour order 8): 36.2,48.7 36.2,50.6 37.2,51.6 43.7,51.6 45.2,50.1 45.2,47.8 49.3,43.7 57.5,43.7 60.7,46.9 68.7,46.9 71.4,44.2 71.4,35.8 67.3,31.7 64.3,31.7 63.3,30.7 63.3,29.9 63.8,29.4 80.9,29.4 81.2,29.7 81.2,31.2 80.5,31.9 76.7,31.9 75.7,32.9 75.7,44.817 78.2,46.9 86.4,46.9 87.5,48 87.5,53.4 86.1,54.8 57.8,54.8 56.1,53.1 54.2,53.1 53.6,52.5 53.6,50.3 51.3,48 48.1,48 46.9,49.2 46.9,51.1 46.7,51.3 46.7,52.5 45.9,53.3 34.7,53.3 34.3,52.9 34.3,49.1 33.4,48.2 25.7,48.2 24.7,47.2 24.7,42.5 26.7,40.5 32.7,40.5 33.3,39.9 33.3,32.3 32.1,31.1 27.514,31.1 22.614,36 16.6,36 16.3,35.7 16.3,32.5 16.899,31.9 24.5,31.9 25.6,30.8 25.6,27.2 26.1,26.7 31.914,26.7 35.1,29.8 35.1,40 33.6,41.5 30,41.5 29.2,42.3 29.2,44.9 29.7,45.4 32.9,45.4
+3.3V on L4 PWR "+3.3V_L04_P017" (solid, remove dead copper, pour order 17): 16.1,5.3 16.1,33.5 34.1,51.5 86.3,51.5 88.2,53.4 128.1,53.4 128.1,4.8 16.6,4.8
HEATER_A_1 on L4 PWR "HEATER_A_1_L04_P004" (solid, pour order 4): 128.5,4.6 128.9,4.2 128.9,2 128.8,1.9 13.9,1.9 12.8,3 12.8,7 9,7 6.2,9.8 6.1,9.8 6.1,23.3 6.7,23.9 9.5,23.9 10,24.4 10,25.8 9.5,26.3 6.9,26.3 6.4,26.8 6.4,33.8 8.2,33.8 8.7,34.3 8.7,35.5 8.4,35.8 6,35.8 5.8,36 5.8,38.3 6.4,38.9 10.4,38.9 11.2,38.1 11.2,22.9 9.7,21.4 8.4,21.4 7.5,20.5 7.5,10 9.25,8.25 13.65,8.25 14.2,7.7 14.2,4 15.2,3 77.1,3 78.7,4.6
+12V_Solenoid on L4 PWR "+12V_SOLENOID_L04_P005" (solid, pour order 5): 14.7,20 15.5,20.8 15.5,32 15.5,41 14.5,42 12,42 10.2,43.8 10.2,48.3 9,49.5 6.1,49.5 5.8,49.2 5.8,45.7 6.1,45.4 8.5,45.4 8.7,45.2 8.7,43.5 8.6,43.4 6.3,43.4 6,43.1 6,39.6 6.5,39.1 10.6,39.1 11.4,38.3 11.4,23.3 9.5,21.4 8.9,21.4 7.75,20.25 7.75,10 9.25,8.5 13.8,8.5 14.5,7.8 14.5,4.1 15.6,3 76.4,3 76.4,4.7 16.9,4.7 16.1,5.5 16.1,9.5 10,9.5 9.25,10.25 9.25,19.05 10.2,20
+VCC_SD on L4 PWR "+VCC_SD_L04_P016" (solid, pour order 16): 10.25,19.75 9.5,19 9.5,10.25 10.55,9.2 19.7,9.2 20.5,10 20.5,18.8 19.55,19.75
+5V_TEC on L4 PWR "+5V_TEC_L04_P001" (solid, pour order 1): 69.9,58 70.7,58.8 72.6,58.8 73.4,58 124.7,58 129.1,53.6 129.1,23.7 127.9,22.5 108.4,22.5 107.4,21.5 107.4,14.8 105.2,14.8 105.2,24.9 105.6,25.3 125,25.3 125.5,25.8 125.5,52.4 124.4,53.5 87.75,53.5 86.25,55 57.25,55 55.75,53.5 33.3,53.5 32.55,52.75 14,52.75 13.5,52.25 13.5,49.493 13.624,49.349 14.538,48.5 18.25,48.5 18.5,48.25 18.5,46.75 18.25,46.5 13.25,46.5 11.25,48.5 11.25,55.75 11.75,56.25 15.5,56.25 16,55.75 18.25,55.75 18.5,56 18.5,57.25 19.25,58
+5V_HD4 on L4 PWR "+5V_HD4_L04_P007" (solid, pour order 7): 130.4,56.7 126.6,60.5 16.5,60.5 14.25,60.5 11.25,57.5 11.25,56.75 11.75,56.25 16,56.25 16.25,56 17.75,56 18,56.25 18,57.25 19,58.25 124.9,58.25 129.15,54 129.9,54 130.4,54.5
+12V on L4 PWR "+12V_L04_P014" (solid, pour order 14): 32.9,32.4 32.9,38.9 31.7,40.1 26.8,40.1 24.4,42.5 24.4,47.4 25.4,48.4 33.2,48.4 34,49.2 34,50.75 32.25,52.5 14.25,52.5 13.75,52 13.75,49.75 14.25,49.25 18.25,49.25 18.9,48.6 18.9,40.1 27.25,31.75 32.25,31.75
+12V_IN on L4 PWR "+12V_IN_L04_P003" (solid, pour order 3): 126.7,60.75 128.85,58.6 130.3,58.6 130.7,59 130.675,60.925 130.75,61 130.75,62.5 130.25,63 9,63 4.2,58.2 4.2,54.7 4.2,9.1 7.6,5.7 12.4,5.7 12.6,5.9 12.6,6.8 12.5,6.9 8.8,6.9 6,9.7 6,24.1 9.4,24.1 9.8,24.5 9.8,25.8 9.6,26 6,26 6,33.5 6.5,34 8.2,34 8.6,34.4 8.6,35.3 8.3,35.6 5.8,35.6 5.6,35.8 5.6,43.2 6,43.6 8.3,43.6 8.4,43.7 8.4,45 8.3,45.1 6,45.1 5.6,45.5 5.6,52.4 5.95,52.75 10.5,52.75 11,53.25 11,57.75 14,60.75
GND on L6 BOT "GND_L06_P013" (solid, pour order 13): 63.8,26.7 64.8,25.7 80.1,25.7 81.2,26.8 82.7,26.8 84.1,28.2 84.1,28.9 83.9,29.1 64.4,29.1 63.8,28.5
+5V_SOM on L6 BOT "+5V_SOM_L06_P012" (solid, pour order 12): 63.8,29.4 81.3,29.4 81.7,29.8 81.7,30.9 80.8,31.8 64.4,31.8 63.8,31.2
GND on L6 BOT "GND_L06_P011" (solid, pour order 11): 61.7,50.2 62.7,49.2 78,49.2 79.1,50.3 80.6,50.3 82,51.7 82,52.4 81.8,52.6 62.3,52.6 61.7,52
+5V_SOM on L6 BOT "+5V_SOM_L06_P010" (solid, pour order 10): 61.7,52.9 79.2,52.9 79.6,53.3 79.6,54.4 78.7,55.3 62.3,55.3 61.7,54.7
GND on L2 GND 1 "GND_L02_P019" (solid, remove dead copper, pour order 19): 0,4 ccw(c4,4) 4,0 146,0 ccw(c146,4) 150,4 150,62 ccw(c146,62) 146,66 4,66 ccw(c4,62) 0,62
GND on L5 GND 2 "GNDz_L05_P020" (solid, pour order 20): 0,4 ccw(c4,4) 4,0 146,0 ccw(c146,4) 150,4 150,62 ccw(c146,62) 146,66 4,66 ccw(c4,62) 0,62

## Keep-outs
L1 TOP:
  rectangle: 144,0 150,60
  rectangle: 11.4,10.7 17.6,20.1
  rectangle: 0,0 6,66
L2 GND 1:
  region: 129.5,14.1 130.7,15.3 142.5,15.3 143.6,14.2 143.6,7.6 140,4 131.5,4 129.5,6
  region: 130.8,41.6 143.2,41.6 143.8,41 143.8,34.6 143.2,34 130.8,34 129.7,35.1 129.7,40.5
L5 GND 2:
  region: 143.3,41.6 143.9,41 143.9,34.6 143.2,33.9 130.8,33.9 129.7,35 129.7,40.5 130.8,41.6
  region: 143.5,15.3 144.2,14.6 144.2,8.2 140,4 131.5,4 129.5,6 129.5,14.1 130.7,15.3
L6 BOT:
  rectangle: 144,0 150,66
  region: 149.5,60 149.5,66 0,66 0,60
  rectangle: 0,0 6,66
Keep-Out Layer:
  the board outline again, w1

## Other copper
L1 TOP:
  region net GND: 0.5,7.5 0.5,4 ccw(c4,4) 4,0.5 146,0.5 ccw(c146,4) 149.5,4 149.5,62 ccw(c146,62) 146,65.5 4.006,65.5 ccw(c4,62) 0.5,62 0.5,11 6,11 6,60 144,60 144,1.516 6,1.516 6,7.5
  region net GND: 123.817,57.541 119.717,57.541 117.618,57.541 117.518,57.441 117.518,57.041 117.618,56.941 119.118,56.941 119.218,56.841 119.218,54.441 119.476,54.438 119.476,55.499 119.718,55.741 119.718,56.742 119.917,56.941 121.017,56.941 121.217,56.741 121.217,54.941 121.417,54.741 123.617,54.741 123.817,54.941
  region net GND: 123.692,48.065 119.592,48.065 117.493,48.065 117.393,47.965 117.393,47.565 117.493,47.465 118.993,47.465 119.093,47.365 119.093,44.965 119.351,44.962 119.351,46.024 119.593,46.265 119.593,47.266 119.792,47.465 120.892,47.465 121.092,47.265 121.092,45.465 121.292,45.265 123.492,45.265 123.692,45.465
  region net GND: 123.693,38.565 119.593,38.565 117.494,38.565 117.394,38.465 117.394,38.065 117.494,37.965 118.994,37.965 119.094,37.865 119.094,35.465 119.352,35.462 119.352,36.523 119.594,36.765 119.594,37.766 119.793,37.965 120.893,37.965 121.093,37.765 121.093,35.965 121.293,35.765 123.493,35.765 123.693,35.965
  region net GND: 113.666,23.761 113.666,23.444 114.1,23.01 115.3,23.01 115.7,22.61 115.7,20.11 115.9,19.91 116.9,19.91 117,20.01 117,23.01 116.8,23.21 116.1,23.21 115.549,23.761
  region net GND: 111.7,24.91 113.3,24.91 113.3,23.91 111.7,23.91
  region net GND: 107.8,21.11 107.8,23.01 107.9,23.11 109.1,23.11 109.2,23.21 109.2,23.31 109.3,23.41 110.4,23.41 110.74,23.75 111.3,23.75 111.3,22.31 111,22.01 109.1,22.01 108.7,21.61 108.7,21.11 108.6,21.01 107.9,21.01
  region net GND: 103.666,23.751 103.666,23.434 104.1,23 105.3,23 105.7,22.6 105.7,20.1 105.9,19.9 106.9,19.9 107,20 107,23 106.8,23.2 106.1,23.2 105.55,23.751
  region net GND: 111.45,15.8 113.05,15.8 113.05,14.8 111.45,14.8
  region net GND: 113.416,14.65 113.416,14.334 113.85,13.9 115.05,13.9 115.45,13.5 115.45,11 115.65,10.8 116.65,10.8 116.75,10.9 116.75,13.9 116.55,14.1 115.85,14.1 115.299,14.65
  region net GND: 107.55,12 107.55,13.9 107.65,14 108.85,14 108.95,14.1 108.95,14.2 109.05,14.3 110.15,14.3 110.49,14.64 111.05,14.64 111.05,13.2 110.75,12.9 108.85,12.9 108.45,12.5 108.45,12 108.35,11.9 107.65,11.9
  region net GND: 103.416,14.65 103.416,14.334 103.85,13.9 105.05,13.9 105.45,13.5 105.45,11 105.65,10.8 106.65,10.8 106.75,10.9 106.75,13.9 106.55,14.1 105.85,14.1 105.299,14.65
  region net GND: 101.7,24.9 103.3,24.9 103.3,23.9 101.7,23.9
  region net GND: 97.8,21.1 97.8,23 97.9,23.1 99.1,23.1 99.2,23.2 99.2,23.3 99.3,23.4 100.4,23.4 100.74,23.74 101.3,23.74 101.3,22.3 101,22 99.1,22 98.7,21.6 98.7,21.1 98.6,21 97.9,21
  region net GND: 101.45,15.8 103.05,15.8 103.05,14.8 101.45,14.8
  region net GND: 91.5,61 96.5,61 96.5,25.5 96,25 92,25 91.5,25.5
  region net GND: 97.55,12 97.55,13.9 97.65,14 98.85,14 98.95,14.1 98.95,14.2 99.05,14.3 100.15,14.3 100.49,14.64 101.05,14.64 101.05,13.2 100.75,12.9 98.85,12.9 98.45,12.5 98.45,12 98.35,11.9 97.65,11.9
  region net GND: 29.9,48.6 26.8,48.6 26.5,48.9 26.5,50.7 26.685,50.885 28.685,50.885 29.4,51.6 29.4,54.1 29.3,54.2 26.1,54.2 25.9,54.4 25.9,55.5 26.1,55.7 27.8,55.7 27.9,55.8 27.9,57.1 32.8,57.1 32.8,54.2 30,54.2 30,51.6 30.2,51.4 30.2,48.9
  region net GND: 24.7,57.4 20.6,57.4 18.501,57.4 18.401,57.3 18.401,56.9 18.501,56.8 20.001,56.8 20.101,56.7 20.101,54.3 20.359,54.297 20.359,55.358 20.601,55.6 20.601,56.601 20.8,56.8 21.9,56.8 22.1,56.6 22.1,54.8 22.3,54.6 24.5,54.6 24.7,54.8
  region net GND: 15.193,57.465 11.093,57.465 8.994,57.465 8.894,57.365 8.894,56.965 8.994,56.865 10.494,56.865 10.594,56.765 10.594,54.365 10.852,54.362 10.852,55.423 11.094,55.665 11.094,56.666 11.293,56.865 12.393,56.865 12.593,56.665 12.593,54.865 12.793,54.665 14.993,54.665 15.193,54.865
  region net GND: 24.7,48.1 20.6,48.1 18.501,48.1 18.401,48 18.401,47.6 18.501,47.5 20.001,47.5 20.101,47.4 20.101,45 20.359,44.997 20.359,46.058 20.601,46.3 20.601,47.301 20.8,47.5 21.9,47.5 22.1,47.3 22.1,45.5 22.3,45.3 24.5,45.3 24.7,45.5
  region net GND: 24.7,38.6 20.6,38.6 18.501,38.6 18.401,38.5 18.401,38.1 18.501,38 20.001,38 20.101,37.9 20.101,35.5 20.359,35.497 20.359,36.558 20.601,36.8 20.601,37.801 20.8,38 21.9,38 22.1,37.8 22.1,36 22.3,35.8 24.5,35.8 24.7,36
  region net GND: 15.2,48.1 11.1,48.1 9.001,48.1 8.901,48 8.901,47.6 9.001,47.5 10.501,47.5 10.601,47.4 10.601,45 10.859,44.997 10.859,46.058 11.101,46.3 11.101,47.301 11.3,47.5 12.4,47.5 12.6,47.3 12.6,45.5 12.8,45.3 15,45.3 15.2,45.5
  region net GND: 15.2,38.6 11.1,38.6 9.001,38.6 8.901,38.5 8.901,38.1 9.001,38 10.501,38 10.601,37.9 10.601,35.5 10.859,35.497 10.859,36.558 11.101,36.8 11.101,37.801 11.3,38 12.4,38 12.6,37.8 12.6,36 12.8,35.8 15,35.8 15.2,36
  region net GND: 47.5,61 52.5,61 52.5,25.5 52,25 48,25 47.5,25.5
  region net GND: 29.7,32 26.6,32 26.35,32.25 26.35,33.8 26.535,33.985 28.535,33.985 29.25,34.7 29.25,37.2 29.15,37.3 25.95,37.3 25.75,37.5 25.75,38.6 25.95,38.8 27.65,38.8 27.75,38.9 27.75,40.2 32.65,40.2 32.65,37.3 29.85,37.3 29.85,34.7 30.05,34.5 30.05,32.35
  region net GND: 0.5,11.5 6,11.5 6,7 0.5,7
  region net NTC1+: 22.8,30.5 24.7,30.5 24.7,28.5 22.8,28.5
  region net +12V_IN: 12.4,7.5 12.6,7.3 12.6,5.8 12.5,5.7 11.2,5.7 11.1,5.8 11.1,7 11.6,7.5
  region net +3.3V: 24.8,26.8 20.1,26.8 18.9,28 18.8,27.9 17.1,27.9 17.1,25 20.2,25 21.3,26.1 24.8,26.1
  region net +5V_OUT: 25.95,47.9 25.95,44 26.15,43.8 28.75,43.8 28.95,44 28.95,47.9
  region net +5V_SOM: 25.8,30.9 25.8,27 26,26.8 28.6,26.8 28.8,27 28.8,30.9
  region net +12V_IN: 120.201,34.65 120.201,34.35 117.55,34.35 117,33.8 117,33.5 116.8,33.3 115.45,33.3 115.2,33.55 115.2,35.973 115.427,36.2 116.8,36.2 117,36 117,35.3 117.65,34.65
  region net +12V_IN: 120.2,44.15 120.2,43.85 117.549,43.85 116.999,43.3 116.999,43 116.799,42.8 115.449,42.8 115.199,43.05 115.199,45.473 115.426,45.7 116.799,45.7 116.999,45.5 116.999,44.8 117.649,44.15
  region net +5V_OUT: 120.325,53.626 120.325,53.326 117.674,53.326 117.124,52.776 117.124,52.476 116.924,52.276 115.574,52.276 115.324,52.526 115.324,54.949 115.551,55.176 116.924,55.176 117.124,54.976 117.124,54.276 117.774,53.626
  region net +5V_OUT: 21.208,53.485 21.208,53.185 18.557,53.185 18.007,52.635 18.007,52.335 17.807,52.135 16.457,52.135 16.207,52.385 16.207,54.807 16.434,55.035 17.807,55.035 18.007,54.835 18.007,54.135 18.657,53.485
  region net +5V_OUT: 21.208,44.185 21.208,43.885 18.557,43.885 18.007,43.335 18.007,43.035 17.807,42.835 16.457,42.835 16.207,43.085 16.207,45.507 16.434,45.735 17.807,45.735 18.007,45.535 18.007,44.835 18.657,44.185
  region net +5V_SOM: 21.208,34.685 21.208,34.385 18.557,34.385 18.007,33.835 18.007,33.535 17.807,33.335 16.457,33.335 16.207,33.585 16.207,36.007 16.434,36.235 17.807,36.235 18.007,36.035 18.007,35.335 18.657,34.685
  region net +12V_IN: 11.708,34.685 11.708,34.385 9.057,34.385 8.507,33.835 8.507,33.535 8.307,33.335 6.957,33.335 6.707,33.585 6.707,36.007 6.934,36.235 8.307,36.235 8.507,36.035 8.507,35.335 9.157,34.685
  region net +12V_IN: 11.708,44.185 11.708,43.885 9.057,43.885 8.507,43.335 8.507,43.035 8.307,42.835 6.957,42.835 6.707,43.085 6.707,45.507 6.934,45.735 8.307,45.735 8.507,45.535 8.507,44.835 9.157,44.185
  region net +12V_IN: 11.701,53.55 11.701,53.25 9.05,53.25 8.5,52.7 8.5,52.4 8.3,52.2 6.95,52.2 6.7,52.45 6.7,54.873 6.927,55.1 8.3,55.1 8.5,54.9 8.5,54.2 9.15,53.55
  region net +12V_Solenoid: 6.801,46.7 6.801,48.1 6.901,48.2 8.301,48.2 8.401,48.1 8.401,46.7 8.301,46.6 6.901,46.6
  region net +12V_Solenoid: 9.307,44.685 9.307,44.385 11.915,44.385 12.1,44.2 12.1,43.427 13.201,42.326 13.201,40.401 13.1,40.3 11.4,40.3 11.301,40.201 11.301,39.899 11.374,39.826 15.026,39.826 15.2,40 15.2,43.8 14.315,44.685
  region net +5V_TEC: 18.807,44.685 18.807,44.385 21.415,44.385 21.6,44.2 21.6,43.427 22.701,42.326 22.701,40.401 22.6,40.3 20.9,40.3 20.801,40.201 20.801,39.899 20.874,39.826 24.526,39.826 24.7,40 24.7,43.8 23.815,44.685
  region net +5V_TEC: 16.301,46.7 16.301,48.1 16.401,48.2 17.801,48.2 17.901,48.1 17.901,46.7 17.801,46.6 16.401,46.6
  region net HEATER_A_1: 9.307,35.185 9.307,34.885 11.915,34.885 12.1,34.7 12.1,33.927 13.201,32.826 13.201,30.901 13.1,30.8 11.4,30.8 11.301,30.701 11.301,30.399 11.374,30.326 15.026,30.326 15.2,30.5 15.2,34.3 14.315,35.185
  region net HEATER_A_1: 6.801,37.2 6.801,38.6 6.901,38.7 8.301,38.7 8.401,38.6 8.401,37.2 8.301,37.1 6.901,37.1
  region net +12V: 9.306,54.055 9.306,53.746 9.309,53.743 9.316,53.75 11.952,53.75 12.101,53.6 12.101,52.8 13.201,51.7 13.201,49.8 13.101,49.7 11.401,49.7 11.301,49.6 11.301,49.3 11.401,49.2 15.1,49.2 15.2,49.3 15.2,53.8 14.945,54.055
  region net +12V: 6.801,56.1 6.801,57.5 6.901,57.6 8.301,57.6 8.401,57.5 8.401,56.1 8.301,56 6.901,56
  region net +12V: 30.55,36.7 30.55,34.7 30.45,34.6 30.45,32.3 30.65,32.1 31.35,32.1 31.55,32.3 31.55,34.6 31.15,35 31.15,36.7
  region net +12V: 30.7,53.6 30.7,51.6 30.6,51.5 30.6,49.2 30.8,49 31.5,49 31.7,49.2 31.7,51.5 31.3,51.9 31.3,53.6
  region net NetC28_1: 31.85,36.7 31.85,35.1 32.05,34.9 32.05,31.5 31.65,31.1 31.65,28.5 34.15,28.5 34.05,28.6 34.05,36.3 33.65,36.7
  region net NetC1_1: 32,53.6 32,52 32.2,51.8 32.2,48.4 31.8,48 31.8,45.4 34.3,45.4 34.2,45.5 34.2,53.2 33.8,53.6
  region net +5V_HD4: 18.807,53.985 18.807,53.685 21.415,53.685 21.6,53.5 21.6,52.727 22.701,51.626 22.701,49.701 22.6,49.6 20.9,49.6 20.801,49.501 20.801,49.199 20.874,49.126 24.526,49.126 24.7,49.3 24.7,53.1 23.815,53.985
  region net +5V_HD4: 16.301,56 16.301,57.4 16.401,57.5 17.801,57.5 17.901,57.4 17.901,56 17.801,55.9 16.401,55.9
  region net NTC1+: 16.301,37.2 16.301,38.6 16.401,38.7 17.801,38.7 17.901,38.6 17.901,37.2 17.801,37.1 16.401,37.1
  region net NTC1+: 18.807,35.185 18.807,34.885 21.415,34.885 21.6,34.7 21.6,33.927 22.701,32.826 22.701,30.901 22.6,30.8 20.9,30.8 20.801,30.701 20.801,30.399 20.874,30.326 24.526,30.326 24.7,30.5 24.7,34.3 23.815,35.185
  region net +5V_CAM: 117.924,54.126 117.924,53.826 120.532,53.826 120.717,53.641 120.717,52.868 121.818,51.767 121.818,49.842 121.717,49.741 120.017,49.741 119.918,49.642 119.918,49.341 119.991,49.267 123.643,49.267 123.817,49.441 123.817,53.242 122.932,54.126
  region net +5V_CAM: 115.418,56.141 115.418,57.541 115.518,57.641 116.918,57.641 117.018,57.541 117.018,56.141 116.918,56.041 115.518,56.041
  region net +12V_Laser: 117.8,35.15 117.8,34.85 120.408,34.85 120.593,34.665 120.593,33.892 121.694,32.791 121.694,30.866 121.593,30.765 119.893,30.765 119.794,30.666 119.794,30.365 119.867,30.291 123.519,30.291 123.693,30.465 123.693,34.266 122.808,35.15
  region net +12V_Laser: 115.294,37.165 115.294,38.565 115.394,38.665 116.794,38.665 116.894,38.565 116.894,37.165 116.794,37.065 115.394,37.065
  region net +12V_Photo: 117.799,44.65 117.799,44.35 120.407,44.35 120.592,44.165 120.592,43.392 121.693,42.291 121.693,40.366 121.592,40.265 119.892,40.265 119.793,40.166 119.793,39.865 119.866,39.791 123.518,39.791 123.692,39.965 123.692,43.766 122.807,44.65
  region net +12V_Photo: 115.293,46.665 115.293,48.065 115.393,48.165 116.793,48.165 116.893,48.065 116.893,46.665 116.793,46.565 115.393,46.565
  region net +3.3V: 113.7,25.81 114,26.11 114,26.71 114.1,26.81 114.1,27.41 114.2,27.51 115.6,27.51 115.7,27.41 115.7,27.01 115.6,26.91 114.7,26.91 114.4,26.61 114.4,25.81 114.2,25.61 113.7,25.61
  region net +3.3V: 103.7,25.8 104,26.1 104,26.7 104.1,26.8 104.1,27.4 104.2,27.5 105.6,27.5 105.7,27.4 105.7,27 105.6,26.9 104.7,26.9 104.4,26.6 104.4,25.8 104.2,25.6 103.7,25.6
  region net TEC_OUT_A_1: 102.7,23.6 102.7,22.7 103.6,21.8 104.3,21.1 104.3,20 104.4,19.9 105.2,19.9 105.3,20 105.3,21.7 104.4,22.6 103.8,22.6 103.25,23.15 103.25,23.6
  region net TEC_OUT_A_2: 112.7,23.61 112.7,22.71 113.6,21.81 114.3,21.11 114.3,20.01 114.4,19.91 115.2,19.91 115.3,20.01 115.3,21.71 114.4,22.61 113.8,22.61 113.25,23.16 113.25,23.61
  region net TEC_OUT_B_1: 97.9,20.6 97.8,20.5 97.8,19.9 97.9,19.8 100.3,19.8 100.4,19.9 100.4,21.5 100.3,21.6 99.3,21.6 99.2,21.5 99.2,20.8 99,20.6 98,20.6
  region net TEC_OUT_B_2: 107.9,20.61 107.8,20.51 107.8,19.91 107.9,19.81 110.3,19.81 110.4,19.91 110.4,21.51 110.3,21.61 109.3,21.61 109.2,21.51 109.2,20.81 109,20.61 108,20.61
  region net NetC110_1: 101.7,23.6 101.7,22.4 102.1,22 102.1,19.9 102.2,19.8 103.1,19.8 103.2,19.9 103.2,21.8 102.3,22.7 102.3,23.6
  region net NetC132_1: 111.7,23.61 111.7,22.41 112.1,22.01 112.1,19.91 112.2,19.81 113.1,19.81 113.2,19.91 113.2,21.81 112.3,22.71 112.3,23.61
  region net +3.3V: 113.45,16.7 113.75,17 113.75,17.6 113.85,17.7 113.85,18.3 113.95,18.4 115.35,18.4 115.45,18.3 115.45,17.9 115.35,17.8 114.45,17.8 114.15,17.5 114.15,16.7 113.95,16.5 113.45,16.5
  region net +3.3V: 103.45,16.7 103.75,17 103.75,17.6 103.85,17.7 103.85,18.3 103.95,18.4 105.35,18.4 105.45,18.3 105.45,17.9 105.35,17.8 104.45,17.8 104.15,17.5 104.15,16.7 103.95,16.5 103.45,16.5
  region net TEC_OUT_A_4: 112.45,14.5 112.45,13.6 113.35,12.7 114.1,11.95 114.1,10.85 114.15,10.8 114.95,10.8 115.05,10.9 115.05,12.6 114.15,13.5 113.55,13.5 113,14.05 113,14.5
  region net TEC_OUT_B_3: 97.65,11.5 97.55,11.4 97.55,10.8 97.65,10.7 100.05,10.7 100.15,10.8 100.15,12.4 100.05,12.5 99.05,12.5 98.95,12.4 98.95,11.7 98.75,11.5 97.75,11.5
  region net TEC_OUT_B_4: 107.65,11.5 107.6,11.45 107.6,10.75 107.65,10.7 110.05,10.7 110.1,10.75 110.1,12.45 110.05,12.5 109.05,12.5 108.95,12.4 108.95,11.7 108.75,11.5 107.75,11.5
  region net NetC111_1: 101.45,14.5 101.45,13.3 101.85,12.9 101.85,10.8 101.95,10.7 102.85,10.7 102.95,10.8 102.95,12.7 102.05,13.6 102.05,14.5
  region net NetC133_1: 111.45,14.5 111.45,13.3 111.85,12.9 111.85,10.8 111.95,10.7 112.85,10.7 112.95,10.8 112.95,12.7 112.05,13.6 112.05,14.5
  region net TEC_OUT_B_3: 97.6,11 97.6,10.4 98,10 102.6,10 103.4,9.2 103.4,6.4 104.3,6.4 104.3,9.3 103.1,10.5 100.6,10.5 100.1,11 97.7,11
  region net TEC_OUT_A_3: 104.1,11.1 104.1,10.5 104.8,9.8 104.8,8.4 104.9,8.3 104.9,6.3 105.6,6.3 105.6,10.1 105,10.7 105,11.1
  region net TEC_OUT_B_4: 107.6,10.9 107.6,10.6 107.8,10.4 108.7,10.4 109.4,9.7 109.4,6.3 110.2,6.3 110.2,8.6 110.3,8.7 110.3,10 110.1,10.2 110.1,10.9
  region net TEC_OUT_A_4: 114.1,11.1 114.1,10.2 113.9,10 111.4,10 110.7,9.3 110.7,8.5 110.9,8.3 110.9,6.3 111.6,6.3 111.6,8.8 112,9.2 114.4,9.2 115,9.8 115,11.1
  region net TEC_OUT_A_3: 102.45,14.5 102.45,13.6 103.35,12.7 104.1,11.95 104.1,10.85 104.15,10.8 104.95,10.8 105.05,10.9 105.05,12.4 103.95,13.5 103.55,13.5 103,14.05 103,14.5
L3 SIGNAL:
  region net GND: 4,29 6,27 6,11 0.5,11 0.5,62 cw(c4,62) 4.006,65.5 146,65.5 cw(c146,62) 149.5,62 149.5,4 cw(c146,4) 146,0.5 4,0.5 cw(c4,4) 0.5,4 0.5,7.5 6,7.5 6,1.516 144,1.516 144,64 4,64
  region net GND: 0.5,11.5 6,11.5 6,7 0.5,7